# EAGLE board IMDDC (EAGLE 9.1.3)

Size 140 x 60 mm. Coordinates in mm from the lower left corner, seen from the top.
Outline: 0,0 140,0 140,60 0,60 0,0
Copper layers (1*16): Top 0.035mm / dielectric 1.5mm / Bottom 0.035mm
Design rules "default": minimum track width 6mil, minimum drill 0.35mm, track to track 6mil, track to pad 6mil, pad to pad 6mil, via to via 6mil, smd to smd 6mil, copper to edge 40mil, drill to drill 6mil, minimum pad ring 10mil, minimum via ring 8mil, stop-mask expansion 4mil, vias tented up to drill 0mil, thermal gap 10mil
Net classes: 0 default: width 1 mm, clearance 0.152 mm; 1 LV: clearance 0.001 mm; 2 HV: clearance 2.5 mm

## Footprints (pad centres in the part's own frame; a part is rotated, then mirrored left to right if it is on the bottom)
BENDER_IRR155 = hole 4.2: 5,5; 5,55; 78.25,55; 78.25,5; 135,55; 135,5
15-24-6100 = drill 1.4 square: 1 8.4,-2.75; 2 4.2,-2.75; 3 0,-2.75; 4 -4.2,-2.75; 5 -8.4,-2.75; 6 8.4,2.75; 7 4.2,2.75; 8 0,2.75; 9 -4.2,2.75; 10 -8.4,2.75 | hole 3: 8.4,-10.5; -8.4,-10.5

## Placement (x,y rotation side)
U$1  BENDER_IRR155  [BENDER_IRR155]  0,0 0 top
U$4  15-24-6100  [15-24-6100]  28,18 0 bottom
U$6  15-24-6100  [15-24-6100]  111,18 0 bottom

## Library data of the parts
U$1 U$4 U$6 = ACC-MB-R0

## Nets
+12V: U$6.9 U$6.10
GND: U$6.4 U$6.5
HV+_DRY [HV]: U$4.1 U$4.6
HV+_WET [HV]: U$4.3 U$4.8
HV-_DRY [HV]: U$4.5 U$4.10

## Tracks (layer width: path | path; a pad name or v marks a point on that pad's centre or on a via)
+12V  (1 unrouted)
GND  (1 unrouted)
HV+_DRY  (1 unrouted)
HV+_WET  (1 unrouted)
HV-_DRY  (1 unrouted)
(copper drawn outside any net)
  shapes: Top area x1